# EAGLE board heater_test_1 (EAGLE 7.6.0)
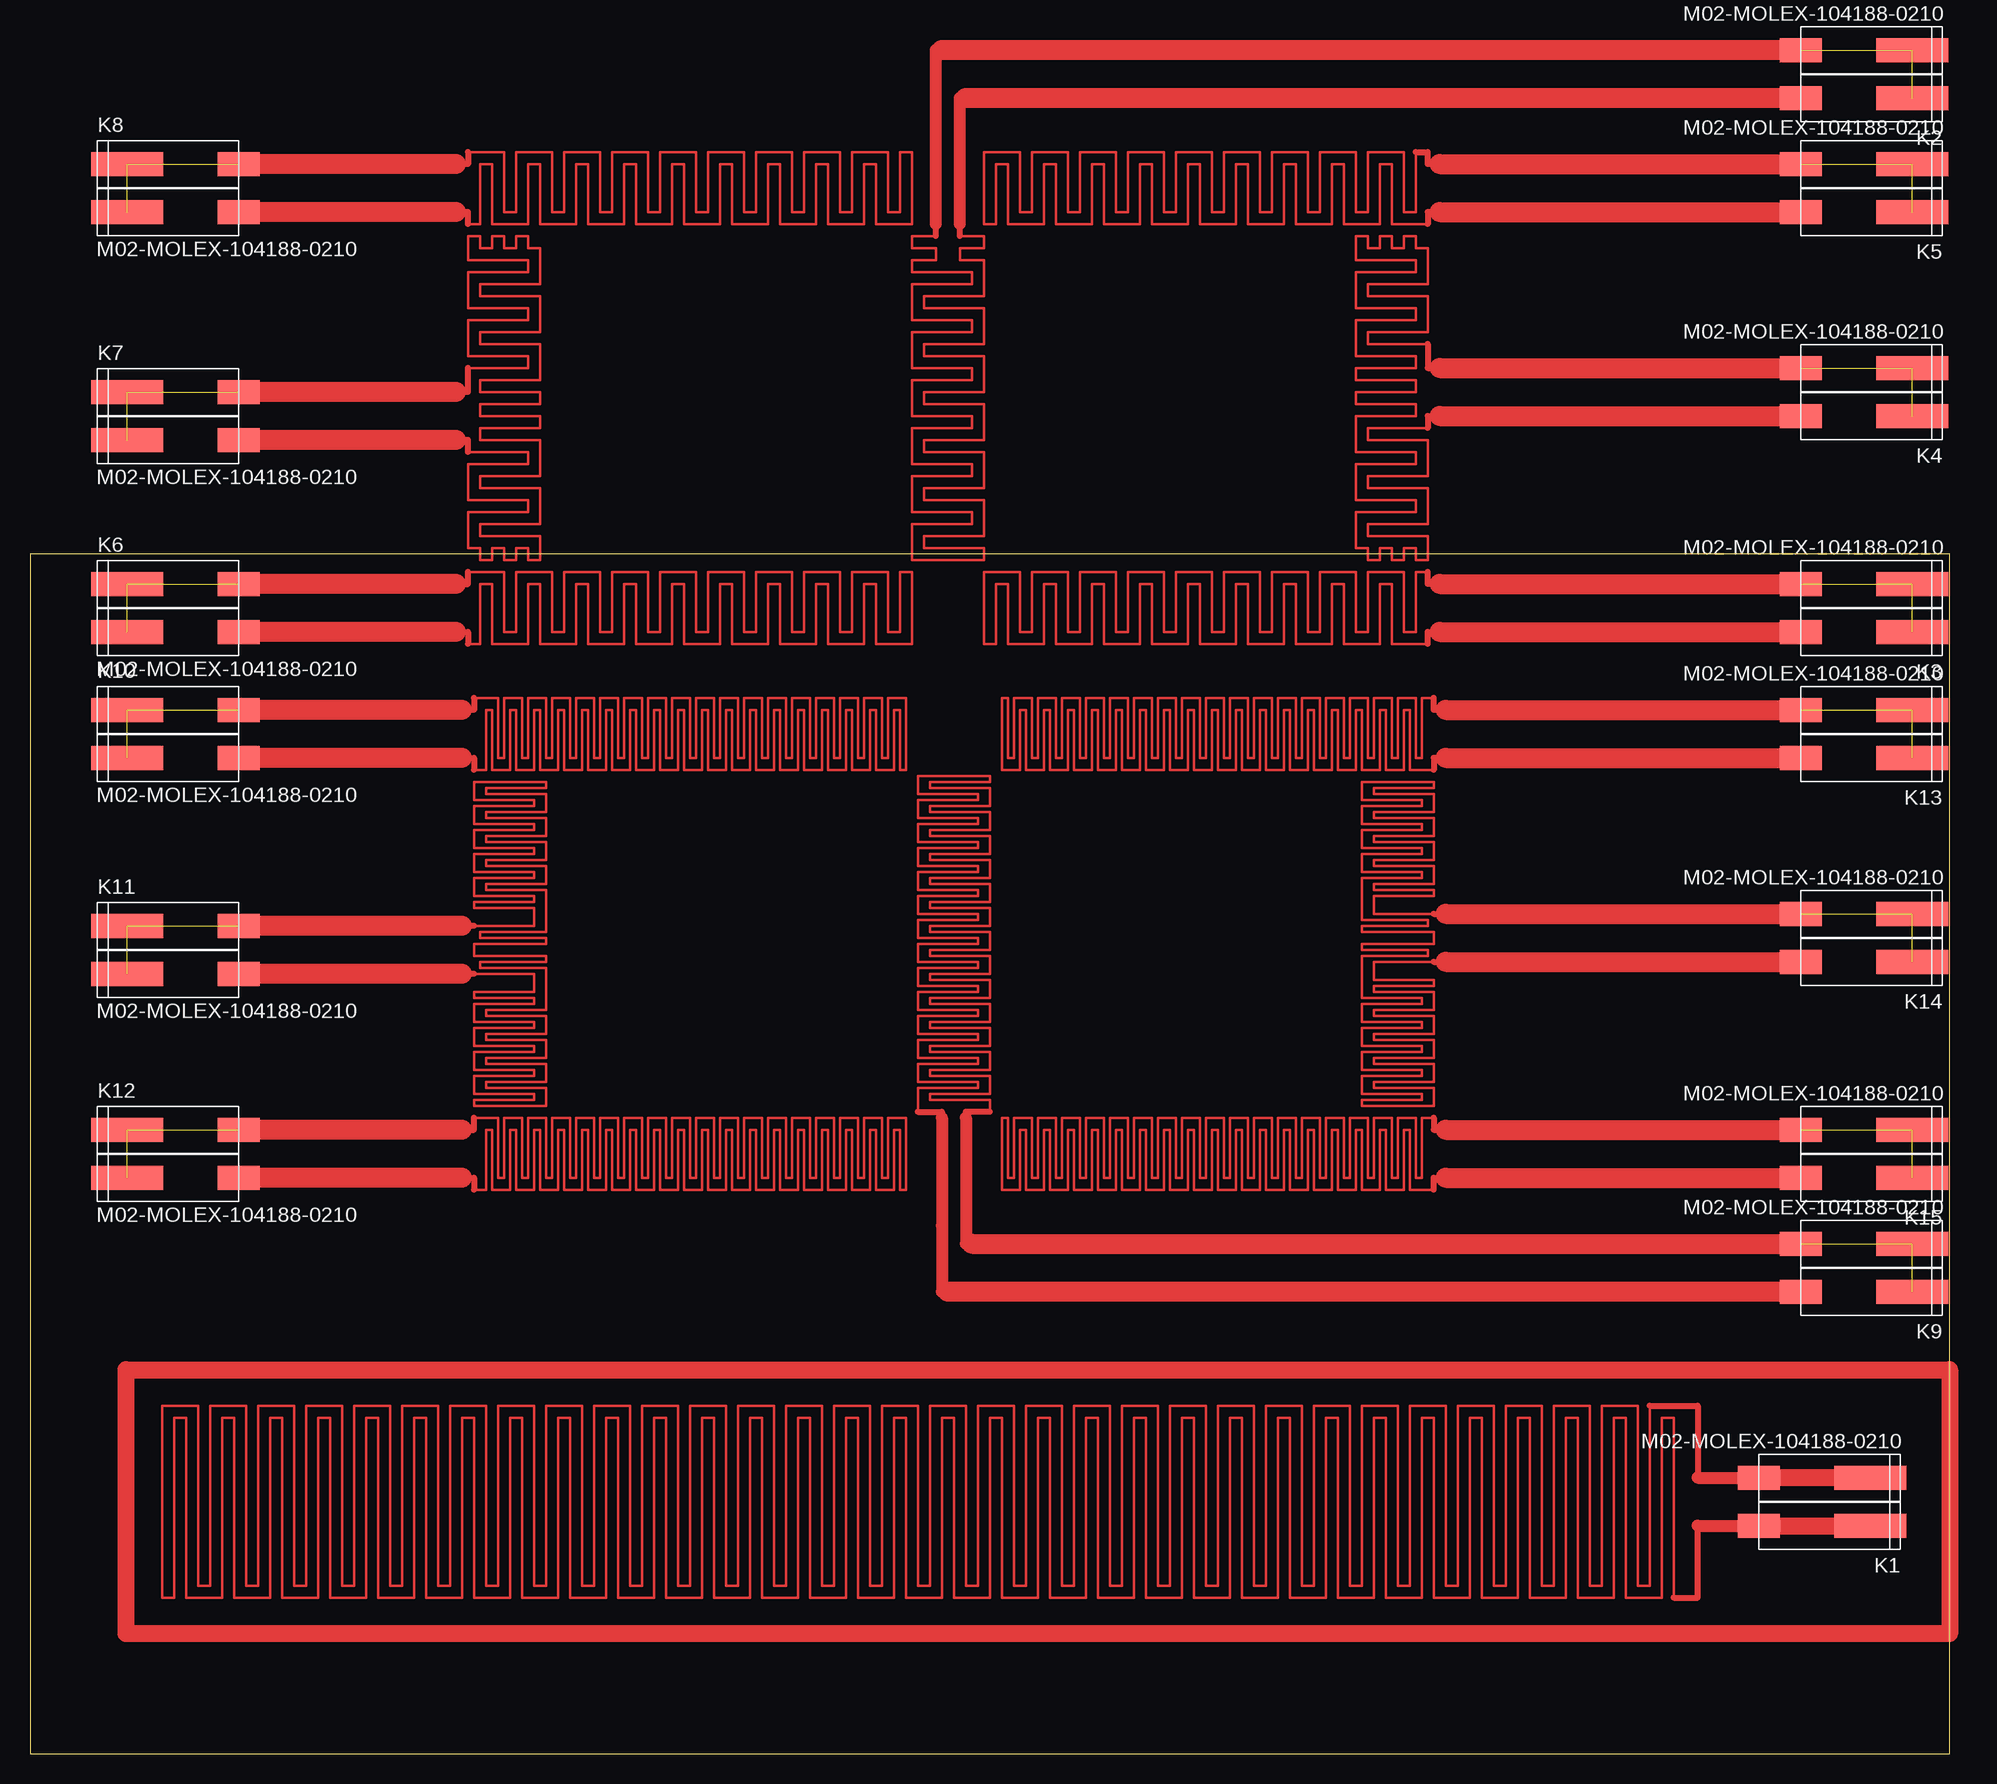
[diagram p0: board, top side]
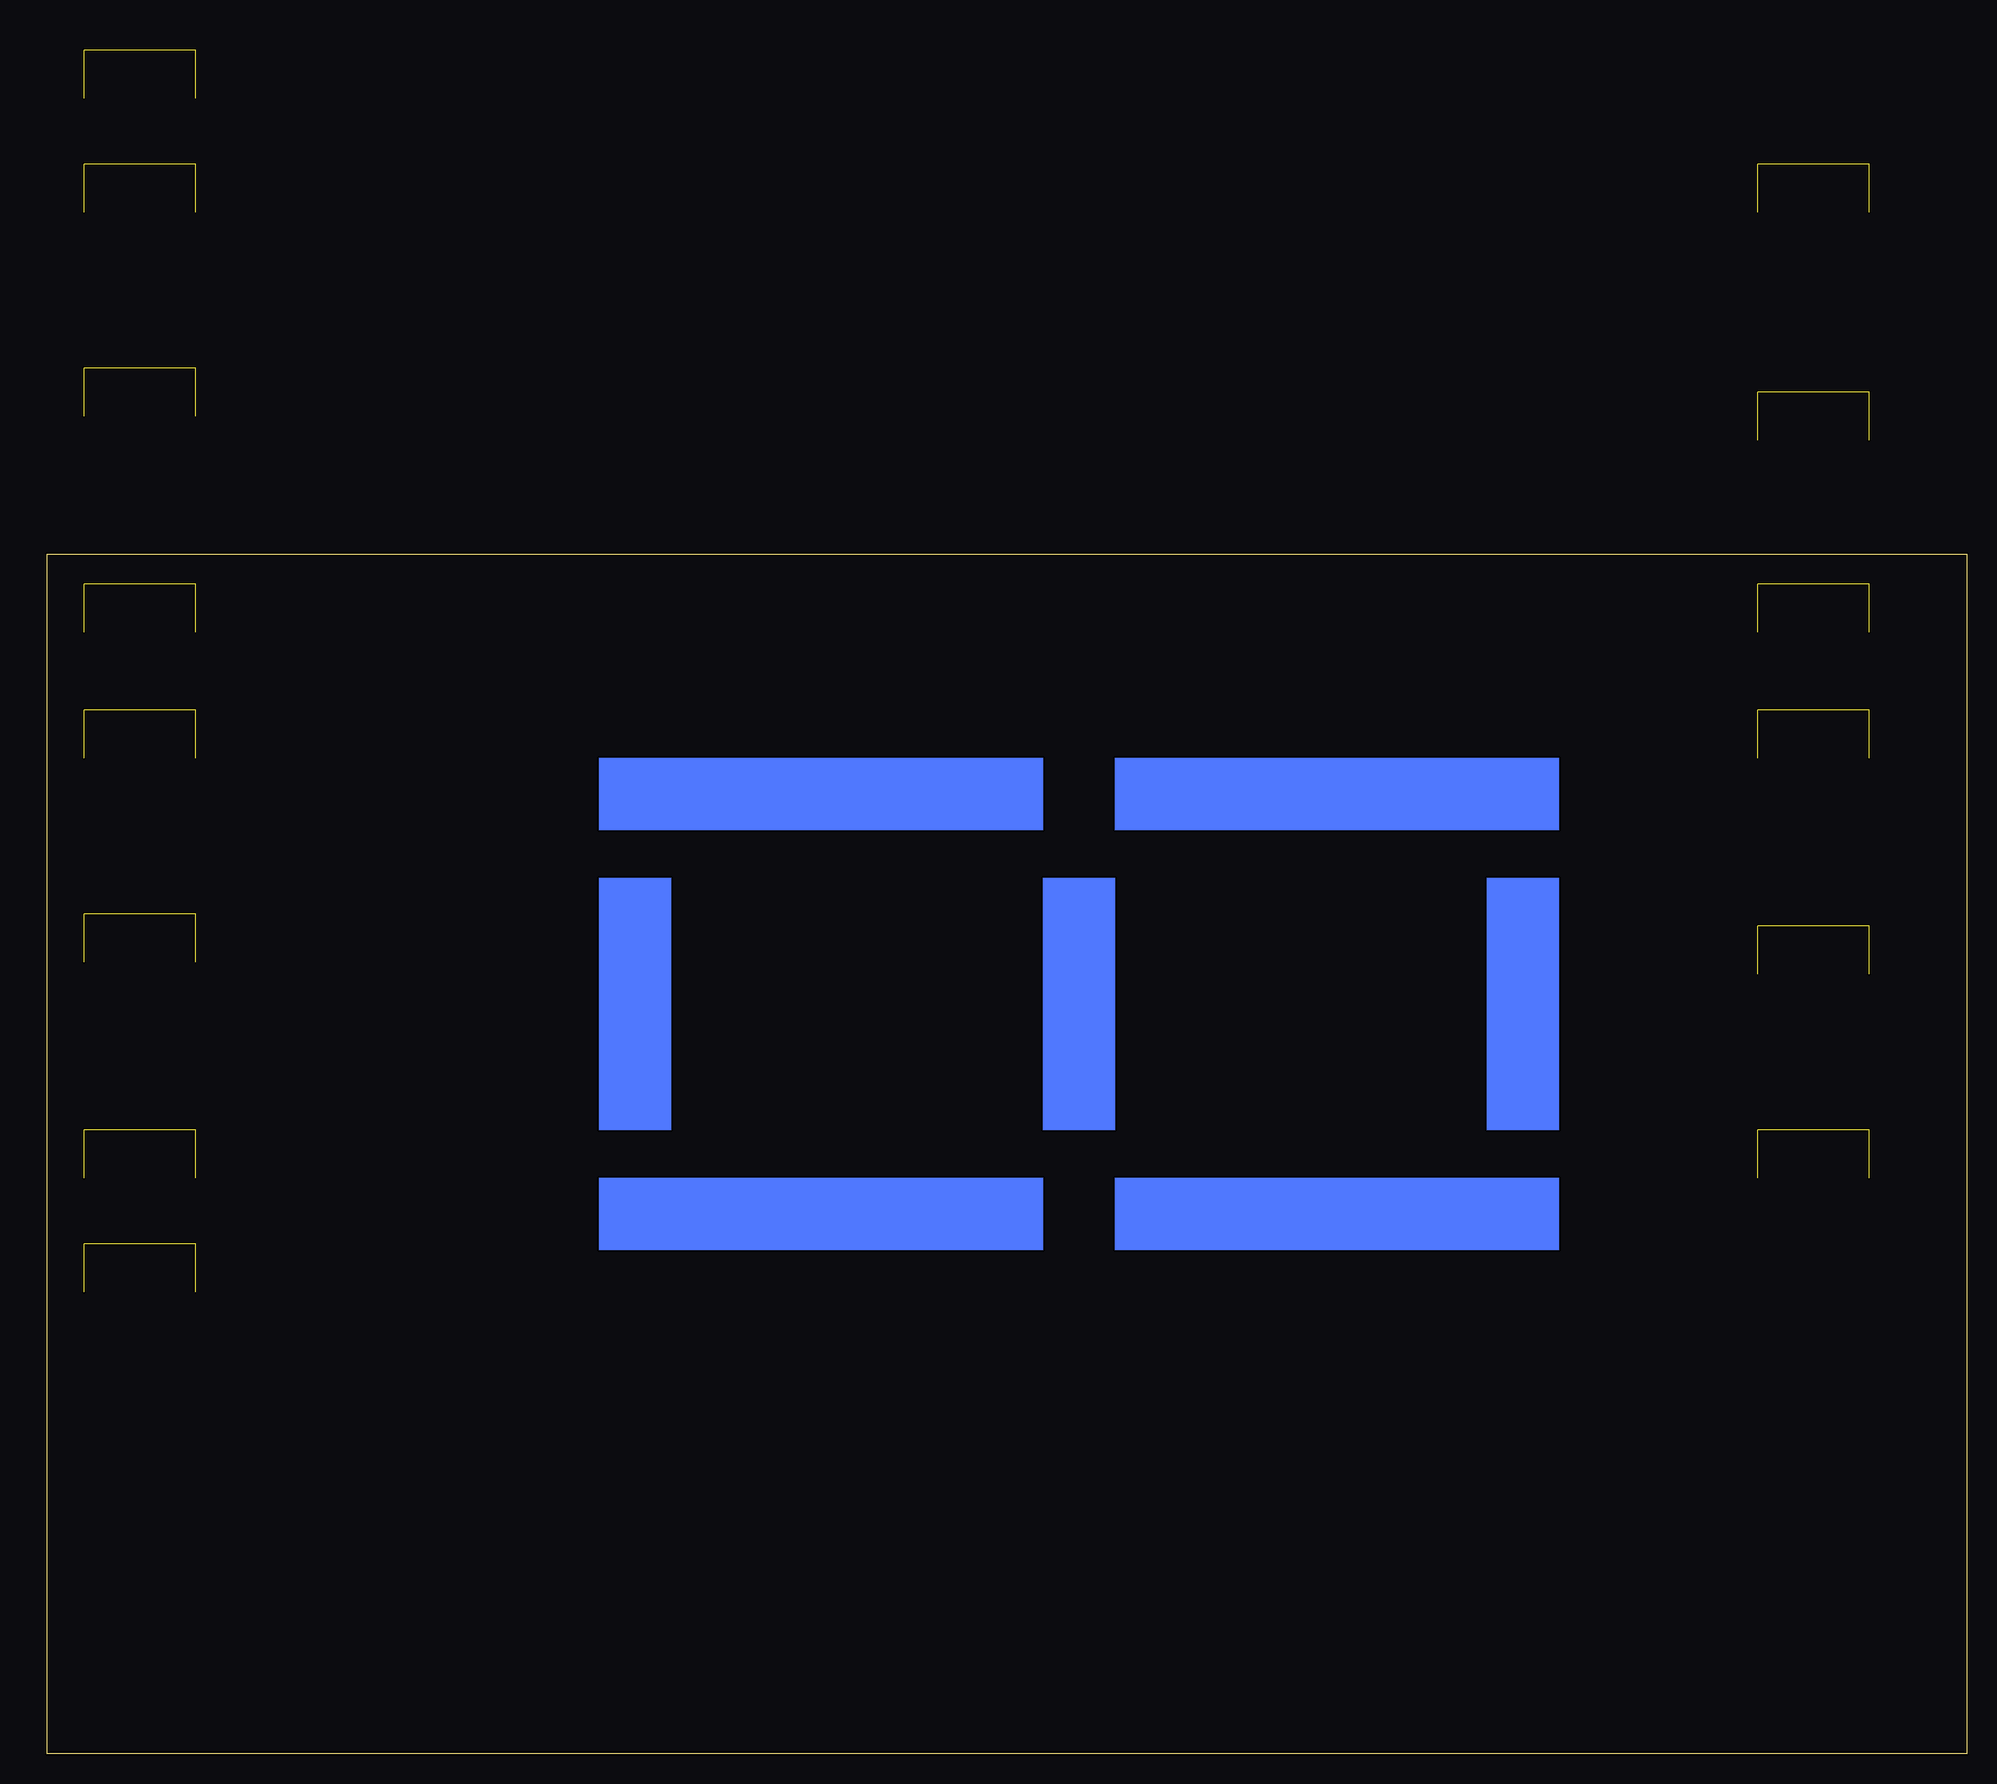
[diagram p1: board, bottom side, seen from below]

Size 160 x 100 mm. Coordinates in mm from the lower left corner, seen from the top.
Outline: 0,0 160,0 160,100 0,100 0,0
Copper layers (1*16): Top 0.035mm / dielectric 1.5mm / Bottom 0.035mm
Design rules "default": minimum track width 10mil, minimum drill 0.6mm, track to track 8mil, track to pad 8mil, pad to pad 8mil, via to via 8mil, smd to smd 8mil, copper to edge 40mil, drill to drill 8mil, minimum pad ring 10mil, minimum via ring 8mil, stop-mask expansion 4mil, vias tented up to drill 0mil, thermal gap 10mil

## Footprints (pad centres in the part's own frame; a part is rotated, then mirrored left to right if it is on the bottom)
LITE-TRAP-CONNECTOR-2 = smd 6 x 2: 1A -3.4,-2; 2A -3.4,2 | smd 3.5 x 2: 1B 5.9,-2; 2B 5.9,2

## Placement (x,y rotation side)
K1  M02-MOLEX-104188-0210  [LITE-TRAP-CONNECTOR-2]  150,21 180 top
K2  M02-MOLEX-104188-0210  [LITE-TRAP-CONNECTOR-2]  153.5,140 180 top  (outside the outline)
K3  M02-MOLEX-104188-0210  [LITE-TRAP-CONNECTOR-2]  153.5,95.5 180 top
K4  M02-MOLEX-104188-0210  [LITE-TRAP-CONNECTOR-2]  153.5,113.5 180 top  (outside the outline)
K5  M02-MOLEX-104188-0210  [LITE-TRAP-CONNECTOR-2]  153.5,130.5 180 top  (outside the outline)
K6  M02-MOLEX-104188-0210  [LITE-TRAP-CONNECTOR-2]  11.5,95.5 0 top
K7  M02-MOLEX-104188-0210  [LITE-TRAP-CONNECTOR-2]  11.5,111.5 0 top  (outside the outline)
K8  M02-MOLEX-104188-0210  [LITE-TRAP-CONNECTOR-2]  11.5,130.5 0 top  (outside the outline)
K9  M02-MOLEX-104188-0210  [LITE-TRAP-CONNECTOR-2]  153.5,40.5 180 top
K10  M02-MOLEX-104188-0210  [LITE-TRAP-CONNECTOR-2]  11.5,85 0 top
K11  M02-MOLEX-104188-0210  [LITE-TRAP-CONNECTOR-2]  11.5,67 0 top
K12  M02-MOLEX-104188-0210  [LITE-TRAP-CONNECTOR-2]  11.5,50 0 top
K13  M02-MOLEX-104188-0210  [LITE-TRAP-CONNECTOR-2]  153.5,85 180 top
K14  M02-MOLEX-104188-0210  [LITE-TRAP-CONNECTOR-2]  153.5,68 180 top
K15  M02-MOLEX-104188-0210  [LITE-TRAP-CONNECTOR-2]  153.5,50 180 top

## Library data of the parts
K1-K15 = simbits

## Nets
H_N: K1.1A K1.1B K1.2A K1.2B
N$2: K2.1A K2.1B K2.2A K2.2B
N$3: K3.1A K3.1B K3.2A K3.2B
N$4: K4.1A K4.1B K4.2A K4.2B
N$5: K5.1A K5.1B K5.2A K5.2B
N$6: K6.1A K6.1B K6.2A K6.2B
N$7: K7.1A K7.1B K7.2A K7.2B
N$8: K8.1A K8.1B K8.2A K8.2B
N$11: K9.1A K9.1B K9.2A K9.2B
N$12: K10.1A K10.1B K10.2A K10.2B
N$15: K11.1A K11.1B K11.2A K11.2B
N$20: K12.1A K12.1B K12.2A K12.2B
N$21: K13.1A K13.1B K13.2A K13.2B
N$22: K14.1A K14.1B K14.2A K14.2B
N$23: K15.1A K15.1B K15.2A K15.2B

## Tracks (layer width: path | path; a pad name or v marks a point on that pad's centre or on a via)
H1
  Top 0.203: 37,53 39,53 39,48 39.5,48 39.5,53 41,53 41,48 41.5,48 41.5,53 43,53 43,48 43.5,48 43.5,53 45,53 45,48 45.5,48 45.5,53 47,53 47,48 47.5,48 47.5,53 49,53 49,48 49.5,48 49.5,53 51,53 51,48 51.5,48 51.5,53 53,53 53,48 53.5,48 53.5,53 55,53 55,48 55.5,48 55.5,53 57,53 57,48 57.5,48 57.5,53 59,53 59,48 59.5,48 59.5,53 61,53 61,48 61.5,48 61.5,53 63,53 63,48 63.5,48 63.5,53 65,53 65,48 65.5,48 65.5,53 67,53 67,48 67.5,48 67.5,53 69,53 69,48 69.5,48 69.5,53 71,53 71,48 71.5,48 71.5,53 73,53 73,48 73,47 72.5,47 72.5,52 72,52 72,47 70.5,47 70.5,52 70,52 70,47 68.5,47 68.5,52 68,52 68,47 66.5,47 66.5,52 66,52 66,47 64.5,47 64.5,52 64,52 64,47 62.5,47 62.5,52 62,52 62,47 60.5,47 60.5,52 60,52 60,47 58.5,47 58.5,52 58,52 58,47 56.5,47 56.5,52 56,52 56,48 56,47 54.5,47 54.5,52 54,52 54,47 52.5,47 52.5,52 52,52 52,47 50.5,47 50.5,52 50,52 50,47 48.5,47 48.5,52 48,52 48,47 46.5,47 46.5,52 46,52 46,47 44.5,47 44.5,52 44,52 44,47 42.5,47 42.5,52 42,52 42,47 40.5,47 40.5,52 40,52 40,47 38.5,47 38.5,52 38,52 38,48 38,47 37,47
  Top 0.5: 37,53 37,52 36,52 | 36,48 37,48 37,47
  Top 1.676: 36,52 16.5,52 | 36,48 17.5,48
H2
  Top 0.203: 37,88 39,88 39,83 39.5,83 39.5,88 41,88 41,83 41.5,83 41.5,88 43,88 43,83 43.5,83 43.5,88 45,88 45,83 45.5,83 45.5,88 47,88 47,83 47.5,83 47.5,88 49,88 49,83 49.5,83 49.5,88 51,88 51,83 51.5,83 51.5,88 53,88 53,83 53.5,83 53.5,88 55,88 55,83 55.5,83 55.5,88 57,88 57,83 57.5,83 57.5,88 59,88 59,83 59.5,83 59.5,88 61,88 61,83 61.5,83 61.5,88 63,88 63,83 63.5,83 63.5,88 65,88 65,83 65.5,83 65.5,88 67,88 67,83 67.5,83 67.5,88 69,88 69,83 69.5,83 69.5,88 71,88 71,83 71.5,83 71.5,88 73,88 73,83 73,82 72.5,82 72.5,87 72,87 72,82 70.5,82 70.5,87 70,87 70,82 68.5,82 68.5,87 68,87 68,82 66.5,82 66.5,87 66,87 66,82 64.5,82 64.5,87 64,87 64,82 62.5,82 62.5,87 62,87 62,82 60.5,82 60.5,87 60,87 60,82 58.5,82 58.5,87 58,87 58,82 56.5,82 56.5,87 56,87 56,83 56,82 54.5,82 54.5,87 54,87 54,82 52.5,82 52.5,87 52,87 52,82 50.5,82 50.5,87 50,87 50,82 48.5,82 48.5,87 48,87 48,82 46.5,82 46.5,87 46,87 46,82 44.5,82 44.5,87 44,87 44,82 42.5,82 42.5,87 42,87 42,82 40.5,82 40.5,87 40,87 40,82 38.5,82 38.5,87 38,87 38,83 38,82 37,82
H3
  Top 0.203: 117,82 115,82 115,87 114.5,87 114.5,82 113,82 113,87 112.5,87 112.5,82 111,82 111,87 110.5,87 110.5,82 109,82 109,87 108.5,87 108.5,82 107,82 107,87 106.5,87 106.5,82 105,82 105,87 104.5,87 104.5,82 103,82 103,87 102.5,87 102.5,82 101,82 101,87 100.5,87 100.5,82 99,82 99,87 98.5,87 98.5,82 97,82 97,87 96.5,87 96.5,82 95,82 95,87 94.5,87 94.5,82 93,82 93,87 92.5,87 92.5,82 91,82 91,87 90.5,87 90.5,82 89,82 89,87 88.5,87 88.5,82 87,82 87,87 86.5,87 86.5,82 85,82 85,87 84.5,87 84.5,82 83,82 83,87 82.5,87 82.5,82 81,82 81,87 81,88 81.5,88 81.5,83 82,83 82,88 83.5,88 83.5,83 84,83 84,88 85.5,88 85.5,83 86,83 86,88 87.5,88 87.5,83 88,83 88,88 89.5,88 89.5,83 90,83 90,88 91.5,88 91.5,83 92,83 92,88 93.5,88 93.5,83 94,83 94,88 95.5,88 95.5,83 96,83 96,88 97.5,88 97.5,83 98,83 98,87 98,88 99.5,88 99.5,83 100,83 100,88 101.5,88 101.5,83 102,83 102,88 103.5,88 103.5,83 104,83 104,88 105.5,88 105.5,83 106,83 106,88 107.5,88 107.5,83 108,83 108,88 109.5,88 109.5,83 110,83 110,88 111.5,88 111.5,83 112,83 112,88 113.5,88 113.5,83 114,83 114,88 115.5,88 115.5,83 116,83 116,87 116,88 117,88
H4
  Top 0.203: 117,47 115,47 115,52 114.5,52 114.5,47 113,47 113,52 112.5,52 112.5,47 111,47 111,52 110.5,52 110.5,47 109,47 109,52 108.5,52 108.5,47 107,47 107,52 106.5,52 106.5,47 105,47 105,52 104.5,52 104.5,47 103,47 103,52 102.5,52 102.5,47 101,47 101,52 100.5,52 100.5,47 99,47 99,52 98.5,52 98.5,47 97,47 97,52 96.5,52 96.5,47 95,47 95,52 94.5,52 94.5,47 93,47 93,52 92.5,52 92.5,47 91,47 91,52 90.5,52 90.5,47 89,47 89,52 88.5,52 88.5,47 87,47 87,52 86.5,52 86.5,47 85,47 85,52 84.5,52 84.5,47 83,47 83,52 82.5,52 82.5,47 81,47 81,52 81,53 81.5,53 81.5,48 82,48 82,53 83.5,53 83.5,48 84,48 84,53 85.5,53 85.5,48 86,48 86,53 87.5,53 87.5,48 88,48 88,53 89.5,53 89.5,48 90,48 90,53 91.5,53 91.5,48 92,48 92,53 93.5,53 93.5,48 94,48 94,53 95.5,53 95.5,48 96,48 96,53 97.5,53 97.5,48 98,48 98,52 98,53 99.5,53 99.5,48 100,48 100,53 101.5,53 101.5,48 102,48 102,53 103.5,53 103.5,48 104,48 104,53 105.5,53 105.5,48 106,48 106,53 107.5,53 107.5,48 108,48 108,53 109.5,53 109.5,48 110,48 110,53 111.5,53 111.5,48 112,48 112,53 113.5,53 113.5,48 114,48 114,53 115.5,53 115.5,48 116,48 116,52 116,53 117,53
H5
  Top 0.203: 74,53.5 74,55.5 79,55.5 79,56 74,56 74,57.5 79,57.5 79,58 74,58 74,59.5 79,59.5 79,60 74,60 74,61.5 79,61.5 79,62 74,62 74,63.5 79,63.5 79,64 74,64 74,65.5 79,65.5 79,66 74,66 74,67.5 79,67.5 79,68 74,68 74,69.5 79,69.5 79,70 74,70 74,71.5 79,71.5 79,72 74,72 74,73.5 79,73.5 79,74 74,74 74,75.5 79,75.5 79,76 74,76 74,77.5 79,77.5 79,78 74,78 74,79.5 79,79.5 79,80 74,80 74,81.5 80,81.5 80,81 75,81 75,80.5 80,80.5 80,79 75,79 75,78.5 80,78.5 80,77 75,77 75,76.5 80,76.5 80,75 75,75 75,74.5 80,74.5 80,73 75,73 75,72.5 79,72.5 80,72.5 80,71 75,71 75,70.5 80,70.5 80,69 75,69 75,68.5 80,68.5 80,67 75,67 75,66.5 80,66.5 80,65 75,65 75,64.5 80,64.5 80,63 75,63 75,62.5 80,62.5 80,61 75,61 75,60.5 80,60.5 80,59 75,59 75,58.5 80,58.5 80,57 75,57 75,56.5 80,56.5 80,55 75,55 75,54.5 79,54.5 80,54.5 80,53.5
  Top 0.5: 74,53.5 76,53.5 76,53 | 80,53.5 78,53.5 78,53
  Top 1: 76,53 76,44 76,38.5 76.5,38.5 | 78,53 78,42.5 78.5,42.5
  Top 1.676: 78.5,42.5 148,42.5 | 148.5,38.5 76.5,38.5
H_N
  Top 0.203: 135,29 135,14 134,14 134,29 131,29 131,14 130,14 130,29 127,29 127,14 126,14 126,29 123,29 123,14 122,14 122,29 119,29 119,14 118,14 118,29 115,29 115,14 114,14 114,29 111,29 111,14 110,14 110,29 107,29 107,14 106,14 106,29 103,29 103,14 102,14 102,29 99,29 99,14 98,14 98,29 95,29 95,14 94,14 94,29 91,29 91,14 90,14 90,29 87,29 87,14 86,14 86,29 83,29 83,14 82,14 82,29 79,29 79,14 78,14 78,29 75,29 75,14 74,14 74,29 71,29 71,14 70,14 70,29 67,29 67,14 66,14 66,29 63,29 63,14 62,14 62,29 59,29 59,14 58,14 58,29 55,29 55,14 54,14 54,29 51,29 51,14 50,14 50,29 47,29 47,14 46,14 46,29 43,29 43,14 42,14 42,29 39,29 39,14 38,14 38,29 35,29 35,14 34,14 34,29 31,29 31,14 30,14 30,29 27,29 27,14 26,14 26,29 23,29 23,14 22,14 22,29 19,29 19,14 18,14 18,29 15,29 15,14 14,14 14,29 11,29 11,13 12,13 12,27 12,28 13,28 13,13 16,13 16,28 17,28 17,13 20,13 20,28 21,28 21,13 24,13 24,28 25,28 25,13 28,13 28,28 29,28 29,13 32,13 32,28 33,28 33,13 36,13 36,28 37,28 37,13 40,13 40,28 41,28 41,13 44,13 44,28 45,28 45,13 48,13 48,28 49,28 49,13 52,13 52,28 53,28 53,13 56,13 56,14 56,28 57,28 57,13 60,13 60,28 61,28 61,13 64,13 64,28 65,28 65,13 68,13 68,28 69,28 69,13 72,13 72,28 73,28 73,13 76,13 76,28 77,28 77,13 80,13 80,28 81,28 81,13 84,13 84,28 85,28 85,13 88,13 88,28 89,28 89,13 92,13 92,28 93,28 93,13 96,13 96,28 97,28 97,13 100,13 100,28 101,28 101,13 104,13 104,28 105,28 105,13 108,13 108,28 109,28 109,13 112,13 112,28 113,28 113,13 116,13 116,28 117,28 117,13 120,13 120,28 121,28 121,13 124,13 124,28 125,28 125,13 128,13 128,28 129,28 129,13 132,13 132,28 133,28 133,13 136,13 136,28 137,28 137,13
  Top 0.5: 135,29 139,29 139,23 | 137,13 139,13 139,19
  Top 1: 139,23 K1.1B | 139,19 K1.2B
  Top 1.422: K1.1A K1.1B | K1.2B K1.2A
N$1
  Top 1.422: 8,32 160,32 160,10 8,10 8,32
N$2  (3 unrouted)
N$3  (3 unrouted)
N$4  (3 unrouted)
N$5  (3 unrouted)
N$6  (3 unrouted)
N$7  (3 unrouted)
N$8  (3 unrouted)
N$9
  Top 0.203: 36.5,133.5 39.5,133.5 39.5,128.5 40.5,128.5 40.5,133.5 43.5,133.5 43.5,128.5 44.5,128.5 44.5,133.5 47.5,133.5 47.5,128.5 48.5,128.5 48.5,133.5 51.5,133.5 51.5,128.5 52.5,128.5 52.5,133.5 55.5,133.5 55.5,128.5 56.5,128.5 56.5,133.5 59.5,133.5 59.5,128.5 60.5,128.5 60.5,133.5 63.5,133.5 63.5,128.5 64.5,128.5 64.5,133.5 67.5,133.5 67.5,128.5 68.5,128.5 68.5,133.5 71.5,133.5 71.5,128.5 72.5,128.5 72.5,133.5 73.5,133.5 73.5,132.5 73.5,131.5 73.5,127.5 72.5,127.5 70.5,127.5 70.5,132.5 69.5,132.5 69.5,127.5 66.5,127.5 66.5,132.5 65.5,132.5 65.5,127.5 62.5,127.5 62.5,132.5 61.5,132.5 61.5,127.5 58.5,127.5 58.5,132.5 57.5,132.5 57.5,127.5 54.5,127.5 54.5,132.5 53.5,132.5 53.5,127.5 50.5,127.5 50.5,132.5 49.5,132.5 49.5,127.5 46.5,127.5 46.5,132.5 45.5,132.5 45.5,127.5 42.5,127.5 42.5,132.5 41.5,132.5 41.5,127.5 38.5,127.5 38.5,132.5 37.5,132.5 37.5,128.5 37.5,127.5 36.5,127.5
  Top 0.5: 36.5,127.5 36.5,128.5 35.5,128.5 | 36.5,133.5 36.5,132.5 35.5,132.5
  Top 1.676: 35.5,132.5 17.5,132.5 | 35.5,128.5 17.5,128.5
N$10
  Top 0.203: 116.5,110.5 111.5,110.5 111.5,109.5 116.5,109.5 116.5,106.5 111.5,106.5 111.5,105.5 116.5,105.5 116.5,102.5 111.5,102.5 111.5,101.5 116.5,101.5 116.5,99.5 115.5,99.5 115.5,100.5 114.5,100.5 114.5,99.5 113.5,99.5 113.5,100.5 112.5,100.5 112.5,99.5 111.5,99.5 111.5,100.5 110.5,100.5 110.5,102.5 110.5,103.5 115.5,103.5 115.5,104.5 110.5,104.5 110.5,107.5 115.5,107.5 115.5,108.5 110.5,108.5 110.5,111.5 115.5,111.5 115.5,112.5 110.5,112.5 110.5,113.5 115.5,113.5 115.5,114.5 110.5,114.5 110.5,115.5 115.5,115.5 115.5,116.5 110.5,116.5 110.5,119.5 115.5,119.5 115.5,120.5 110.5,120.5 110.5,123.5 115.5,123.5 115.5,124.5 110.5,124.5 110.5,126.5 111.5,126.5 111.5,125.5 112.5,125.5 112.5,126.5 113.5,126.5 113.5,125.5 114.5,125.5 114.5,126.5 115.5,126.5 115.5,125.5 116.5,125.5 116.5,124.5 116.5,123.5 116.5,122.5 111.5,122.5 111.5,121.5 116.5,121.5 116.5,118.5 111.5,118.5 111.5,117.5 116.5,117.5 | 117.5,111.5 118.5,111.5 | 117.5,115.5 118.5,115.5
  Top 0.5: 116.5,110.5 116.5,111.5 117.5,111.5 | 117.5,115.5 116.5,115.5 116.5,117.5
  Top 1.676: 117.5,115.5 146.5,115.5 | 117.5,111.5 147.5,111.5
N$11  (3 unrouted)
N$12  (3 unrouted)
N$13
  Top 0.203: 75.5,126.5 73.5,126.5 73.5,125.5 75.5,125.5 75.5,124.5 73.5,124.5 73.5,123.5 78.5,123.5 78.5,122.5 73.5,122.5 73.5,119.5 78.5,119.5 78.5,118.5 73.5,118.5 73.5,115.5 78.5,115.5 78.5,114.5 73.5,114.5 73.5,111.5 78.5,111.5 78.5,110.5 73.5,110.5 73.5,107.5 78.5,107.5 78.5,106.5 73.5,106.5 73.5,103.5 78.5,103.5 78.5,102.5 73.5,102.5 73.5,99.5 77.5,99.5 78.5,99.5 79.5,99.5 79.5,100.5 74.5,100.5 74.5,101.5 79.5,101.5 79.5,104.5 74.5,104.5 74.5,105.5 79.5,105.5 79.5,108.5 74.5,108.5 74.5,109.5 79.5,109.5 79.5,112.5 74.5,112.5 74.5,113.5 79.5,113.5 79.5,116.5 74.5,116.5 74.5,117.5 79.5,117.5 79.5,120.5 74.5,120.5 74.5,121.5 79.5,121.5 79.5,124.5 77.5,124.5 77.5,125.5 79.5,125.5 79.5,126.5 77.5,126.5
  Top 0.5: 75.5,126.5 75.5,127.5 | 77.5,126.5 77.5,127.5
  Top 1: 75.5,127.5 75.5,136.5 75.5,142 | 77.5,127.5 77.5,136.5 77.5,138
N$14
  Top 0.203: 79.5,129.5 79.5,132.5
N$15  (3 unrouted)
N$16
  Top 0.203: 36.5,115.5 41.5,115.5 41.5,116.5 36.5,116.5 36.5,119.5 41.5,119.5 41.5,120.5 36.5,120.5 36.5,123.5 41.5,123.5 41.5,124.5 36.5,124.5 36.5,126.5 37.5,126.5 37.5,125.5 38.5,125.5 38.5,126.5 39.5,126.5 39.5,125.5 40.5,125.5 40.5,126.5 41.5,126.5 41.5,125.5 42.5,125.5 42.5,123.5 42.5,122.5 37.5,122.5 37.5,121.5 42.5,121.5 42.5,118.5 37.5,118.5 37.5,117.5 42.5,117.5 42.5,114.5 37.5,114.5 37.5,113.5 42.5,113.5 42.5,112.5 37.5,112.5 37.5,111.5 42.5,111.5 42.5,110.5 37.5,110.5 37.5,109.5 42.5,109.5 42.5,106.5 37.5,106.5 37.5,105.5 42.5,105.5 42.5,102.5 37.5,102.5 37.5,101.5 42.5,101.5 42.5,99.5 41.5,99.5 41.5,100.5 40.5,100.5 40.5,99.5 39.5,99.5 39.5,100.5 38.5,100.5 38.5,99.5 37.5,99.5 37.5,100.5 36.5,100.5 36.5,101.5 36.5,102.5 36.5,103.5 41.5,103.5 41.5,104.5 36.5,104.5 36.5,107.5 41.5,107.5 41.5,108.5 36.5,108.5 | 35.5,109.5 34.5,109.5
  Top 0.5: 36.5,115.5 36.5,113.5 35.5,113.5 | 35.5,109.5 36.5,109.5 36.5,108.5
  Top 1.676: 35.5,113.5 16.5,113.5 | 35.5,109.5 17.5,109.5
N$17
  Top 0.203: 116.5,127.5 113.5,127.5 113.5,132.5 112.5,132.5 112.5,127.5 109.5,127.5 109.5,132.5 108.5,132.5 108.5,127.5 105.5,127.5 105.5,132.5 104.5,132.5 104.5,127.5 101.5,127.5 101.5,132.5 100.5,132.5 100.5,127.5 97.5,127.5 97.5,132.5 96.5,132.5 96.5,127.5 93.5,127.5 93.5,132.5 92.5,132.5 92.5,127.5 89.5,127.5 89.5,132.5 88.5,132.5 88.5,127.5 85.5,127.5 85.5,132.5 84.5,132.5 84.5,127.5 81.5,127.5 81.5,132.5 80.5,132.5 80.5,127.5 79.5,127.5 79.5,129.5 79.5,133.5 82.5,133.5 82.5,128.5 83.5,128.5 83.5,133.5 86.5,133.5 86.5,128.5 87.5,128.5 87.5,133.5 90.5,133.5 90.5,128.5 91.5,128.5 91.5,133.5 94.5,133.5 94.5,128.5 95.5,128.5 95.5,133.5 98.5,133.5 98.5,128.5 99.5,128.5 99.5,133.5 102.5,133.5 102.5,128.5 103.5,128.5 103.5,133.5 106.5,133.5 106.5,128.5 107.5,128.5 107.5,133.5 110.5,133.5 110.5,128.5 111.5,128.5 111.5,133.5 114.5,133.5 114.5,128.5 115.5,128.5 115.5,132.5 115.5,133.5
  Top 0.5: 117.5,128.5 116.5,128.5 116.5,127.5 | 117.5,132.5 116.5,132.5 116.5,133.5 115.5,133.5
  Top 1.676: 117.5,132.5 147.5,132.5 | 117.5,128.5 148.5,128.5
N$18
  Top 0.203: 36.5,98.5 39.5,98.5 39.5,93.5 40.5,93.5 40.5,98.5 43.5,98.5 43.5,93.5 44.5,93.5 44.5,98.5 47.5,98.5 47.5,93.5 48.5,93.5 48.5,98.5 51.5,98.5 51.5,93.5 52.5,93.5 52.5,98.5 55.5,98.5 55.5,93.5 56.5,93.5 56.5,98.5 59.5,98.5 59.5,93.5 60.5,93.5 60.5,98.5 63.5,98.5 63.5,93.5 64.5,93.5 64.5,98.5 67.5,98.5 67.5,93.5 68.5,93.5 68.5,98.5 71.5,98.5 71.5,93.5 72.5,93.5 72.5,98.5 73.5,98.5 73.5,97.5 73.5,96.5 73.5,92.5 70.5,92.5 70.5,97.5 69.5,97.5 69.5,92.5 66.5,92.5 66.5,97.5 65.5,97.5 65.5,92.5 62.5,92.5 62.5,97.5 61.5,97.5 61.5,92.5 58.5,92.5 58.5,97.5 57.5,97.5 57.5,92.5 54.5,92.5 54.5,97.5 53.5,97.5 53.5,92.5 50.5,92.5 50.5,97.5 49.5,97.5 49.5,92.5 46.5,92.5 46.5,97.5 45.5,97.5 45.5,92.5 42.5,92.5 42.5,97.5 41.5,97.5 41.5,92.5 38.5,92.5 38.5,97.5 37.5,97.5 37.5,93.5 37.5,92.5 36.5,92.5
  Top 0.5: 35.5,93.5 36.5,93.5 36.5,92.5 | 35.5,97.5 36.5,97.5 36.5,98.5
  Top 1.676: 35.5,97.5 17.5,97.5 | 35.5,93.5 17.5,93.5
N$19
  Top 0.203: 116.5,92.5 113.5,92.5 113.5,97.5 112.5,97.5 112.5,92.5 109.5,92.5 109.5,97.5 108.5,97.5 108.5,92.5 105.5,92.5 105.5,97.5 104.5,97.5 104.5,92.5 101.5,92.5 101.5,97.5 100.5,97.5 100.5,92.5 97.5,92.5 97.5,97.5 96.5,97.5 96.5,92.5 93.5,92.5 93.5,97.5 92.5,97.5 92.5,92.5 89.5,92.5 89.5,97.5 88.5,97.5 88.5,92.5 85.5,92.5 85.5,97.5 84.5,97.5 84.5,92.5 81.5,92.5 81.5,97.5 80.5,97.5 80.5,92.5 79.5,92.5 79.5,93.5 79.5,94.5 79.5,98.5 82.5,98.5 82.5,93.5 83.5,93.5 83.5,98.5 86.5,98.5 86.5,93.5 87.5,93.5 87.5,98.5 90.5,98.5 90.5,93.5 91.5,93.5 91.5,98.5 94.5,98.5 94.5,93.5 95.5,93.5 95.5,98.5 98.5,98.5 98.5,93.5 99.5,93.5 99.5,98.5 102.5,98.5 102.5,93.5 103.5,93.5 103.5,98.5 106.5,98.5 106.5,93.5 107.5,93.5 107.5,98.5 110.5,98.5 110.5,93.5 111.5,93.5 111.5,98.5 114.5,98.5 114.5,93.5 115.5,93.5 115.5,97.5 115.5,98.5 116.5,98.5
  Top 0.5: 117.5,97.5 116.5,97.5 116.5,98.5 | 116.5,92.5 116.5,93.5 117.5,93.5
  Top 1.676: 117.5,97.5 147.5,97.5 | 117.5,93.5 146.5,93.5
N$20  (3 unrouted)
N$21  (3 unrouted)
N$22  (3 unrouted)
N$23  (3 unrouted)
N$24
  Top 0.5: 117,47 117,48 118,48
  Top 1.676: 118,48 147.5,48
N$27
  Top 1.676: 118,70 147,70
N$28
  Top 0.5: 118,83 117,83 117,82
  Top 1.676: 118,83 147.5,83
N$31
  Top 0.5: 37,88 37,87 36,87
  Top 1.676: 36,87 18.5,87
S$1
  Top 0.5: 117,53 117,52 118,52
  Top 1.676: 118,52 147.5,52
S$2
  Top 0.5: 37,82 37,83 36,83
  Top 1.676: 36,83 17.5,83
S$3
  Top 0.5: 117,88 117,87 118,87
  Top 1.676: 118,87 147.5,87
S$4
  Top 1.676: 118,66 148,66
S$5
  Top 0.203: 37,69 42,69 42,70.5 37,70.5 37,71 42,71 42,71.5 37,71.5 37,73 42,73 42,73.5 37,73.5 37,75 42,75 42,75.5 37,75.5 37,77 42,77 42,77.5 37,77.5 37,79 42,79 42,79.5 37,79.5 37,81 42,81 43,81 43,80.5 38,80.5 38,80 43,80 43,78.5 38,78.5 38,78 43,78 43,76.5 38,76.5 38,76 43,76 43,74.5 38,74.5 38,74 43,74 43,72.5 38,72.5 38,72 43,72 43,68.5 42.5,68.5 37.5,68.5 37.5,68 43,68 43,67.5 37,67.5 37,66.5 43,66.5 43,66 37.5,66 37.5,65.5 41.5,65.5 43,65.5 43,63.5 43,62 38,62 38,61.5 43,61.5 43,60 38,60 38,59.5 43,59.5 43,58 38,58 38,57.5 43,57.5 43,56 38,56 38,55.5 43,55.5 43,54 38,54 37,54 37,54.5 42,54.5 42,55 37,55 37,56.5 42,56.5 42,57 37,57 37,58.5 42,58.5 42,59 37,59 37,60.5 42,60.5 42,61 37,61 37,62.5 42,62.5 42,63 37,63 37,63.5 42,63.5 42,65 41.5,65 37,65 | 36,65 35,65
  Top 0.5: 37,65 36,65
  Top 1.676: 36,65 18.5,65
S$6
  Top 0.5: 117,66 118,66
S$7
  Top 0.203: 36,69 35,69
  Top 0.5: 37,69 36,69
  Top 1.676: 36,69 17.5,69
S$8
  Top 0.203: 117,66 112,66 112,64.5 117,64.5 117,64 112,64 112,63.5 117,63.5 117,62 112,62 112,61.5 117,61.5 117,60 112,60 112,59.5 117,59.5 117,58 112,58 112,57.5 117,57.5 117,56 112,56 112,55.5 117,55.5 117,54 112,54 111,54 111,54.5 116,54.5 116,55 111,55 111,56.5 116,56.5 116,57 111,57 111,58.5 116,58.5 116,59 111,59 111,60.5 116,60.5 116,61 111,61 111,62.5 116,62.5 116,63 111,63 111,66.5 111.5,66.5 116.5,66.5 116.5,67 111,67 111,67.5 117,67.5 117,68.5 111,68.5 111,69 116.5,69 116.5,69.5 112.5,69.5 111,69.5 111,71.5 111,73 116,73 116,73.5 111,73.5 111,75 116,75 116,75.5 111,75.5 111,77 116,77 116,77.5 111,77.5 111,79 116,79 116,79.5 111,79.5 111,81 116,81 117,81 117,80.5 112,80.5 112,80 117,80 117,78.5 112,78.5 112,78 117,78 117,76.5 112,76.5 112,76 117,76 117,74.5 112,74.5 112,74 117,74 117,72.5 112,72.5 112,72 117,72 117,71.5 112,71.5 112,70 112.5,70 117,70
  Top 0.5: 117,70 118,70
S$9
  Top 1.676: 147,142 76,142
S$10
  Top 1.676: 147.5,138 78,138
(copper drawn outside any net)
  shapes: Bottom area x7